# Altium PCB St_Olavs_Alarm.PcbDoc
Units mm, origin at the board's own origin, x right, y up, seen from the top; angles counter-clockwise.
Board outline 44.97 x 44.34 mm, 4 copper layers (Top Layer, Layer 1, Layer 2, Bottom Layer), stack 0.353 mm thick; 45 components, 28 nets, 150 pads, 54 vias.
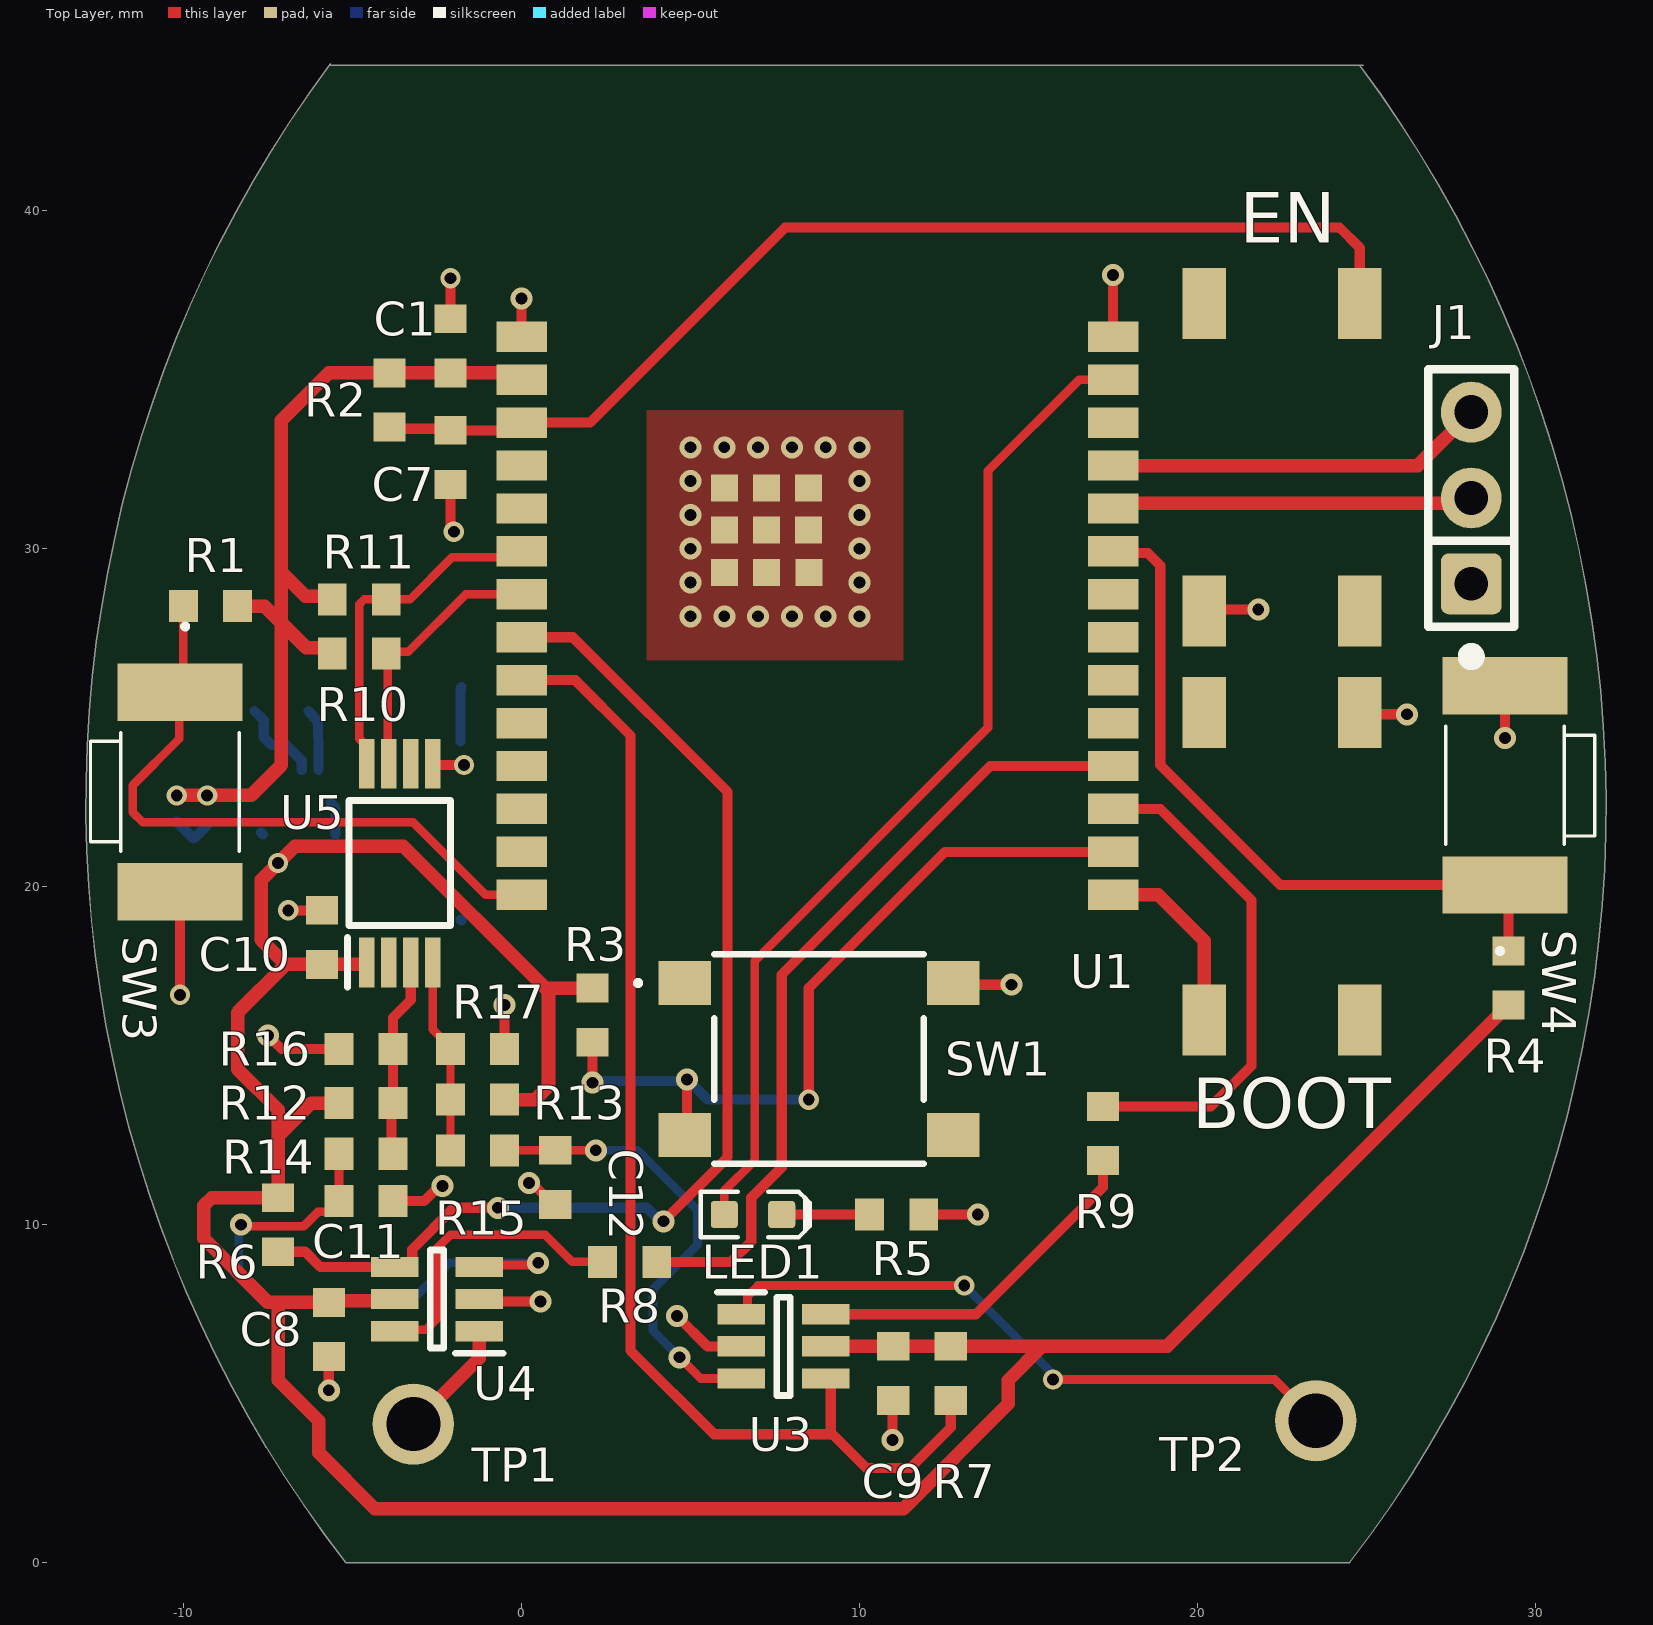
[diagram p0: Top Layer view]
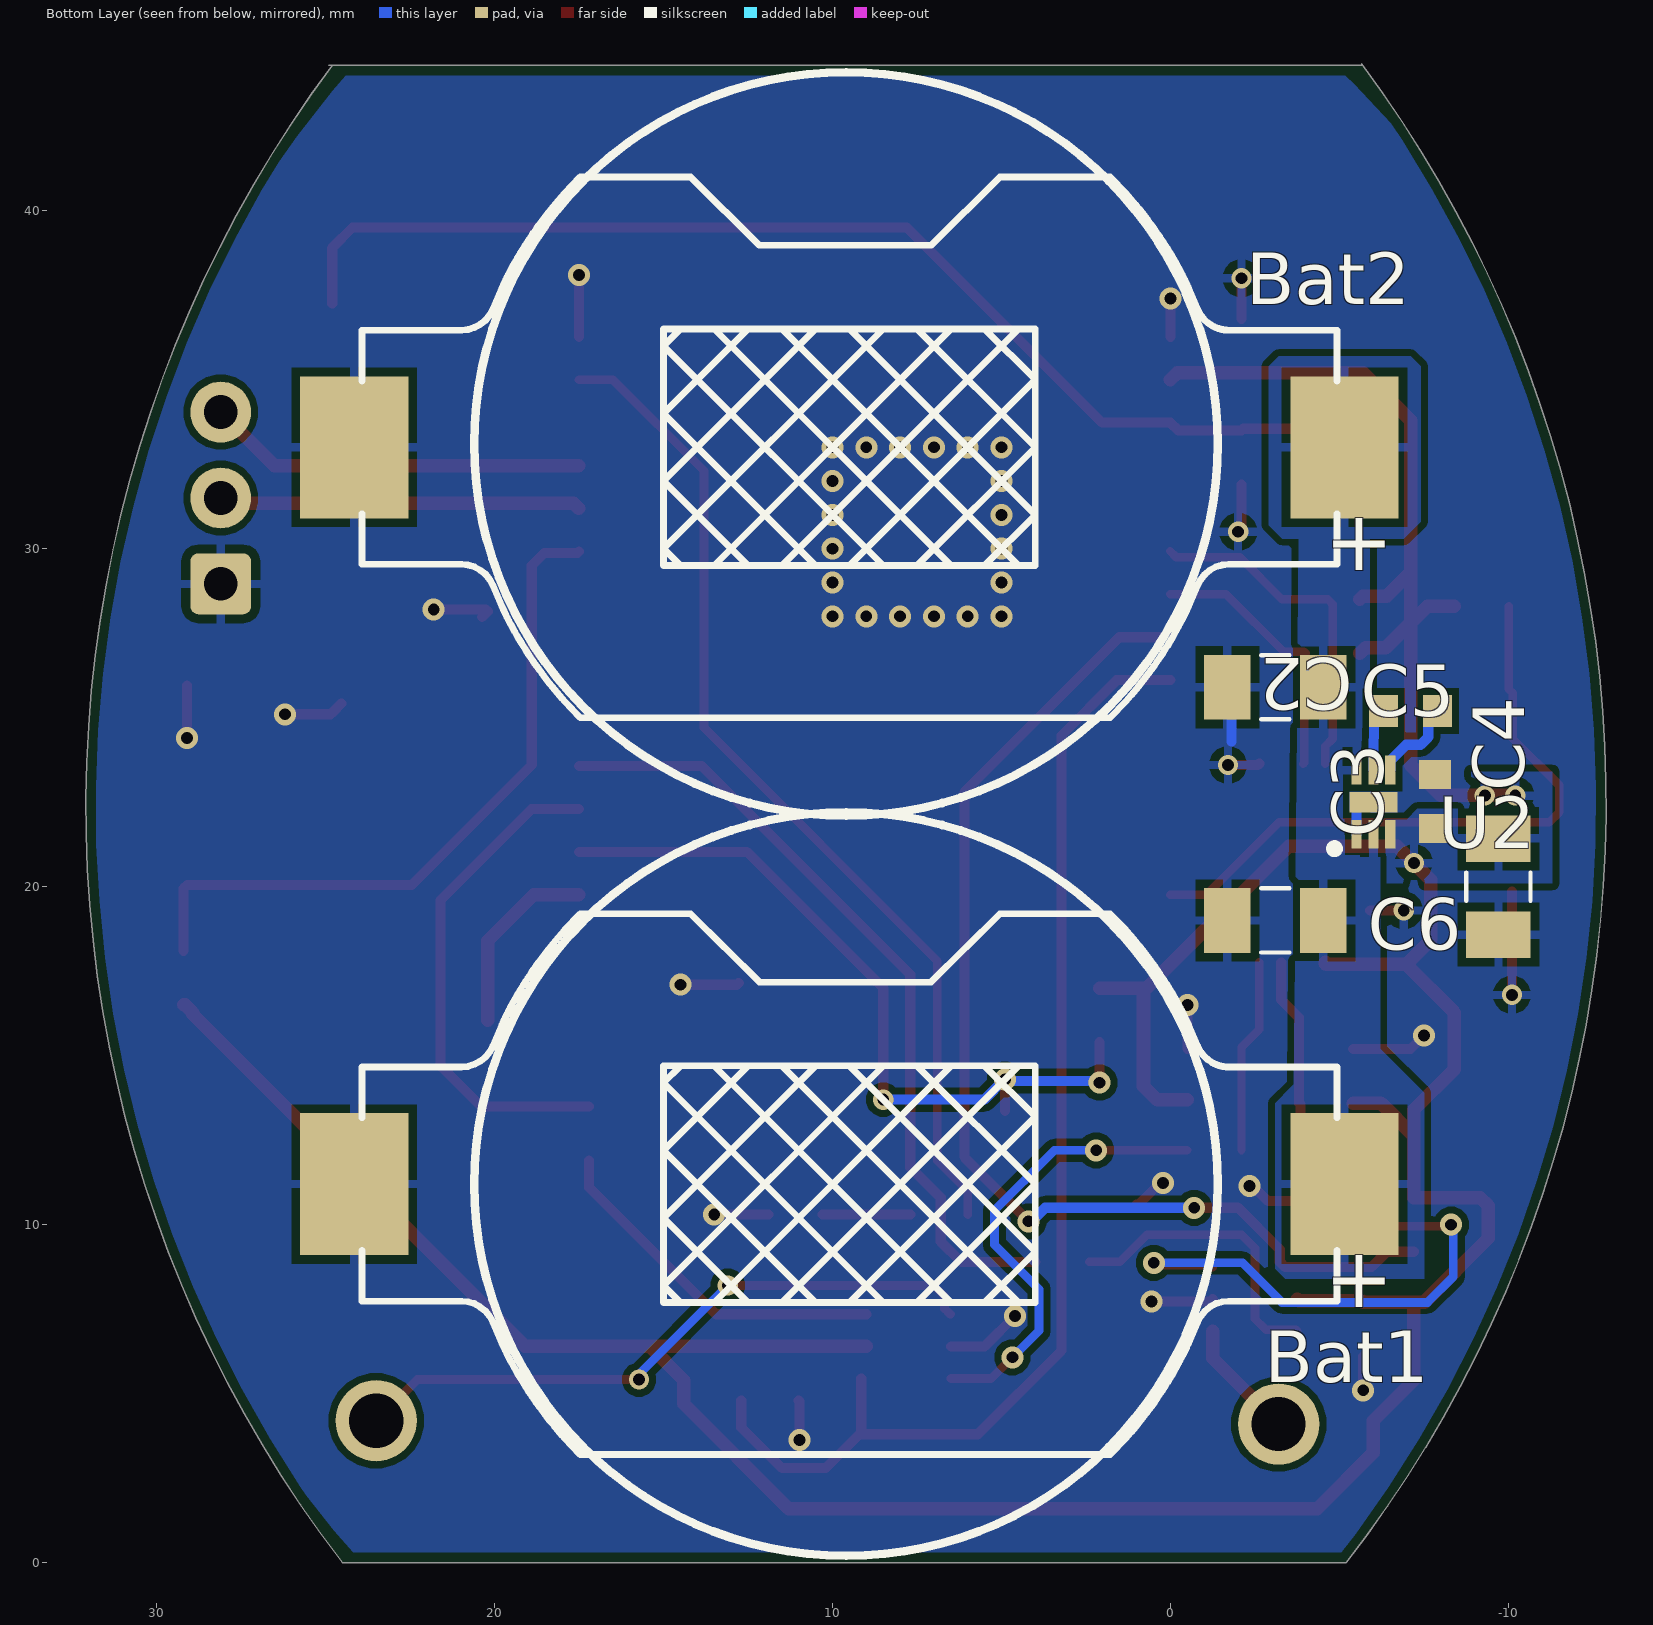
[diagram p1: Bottom Layer view, seen from below]
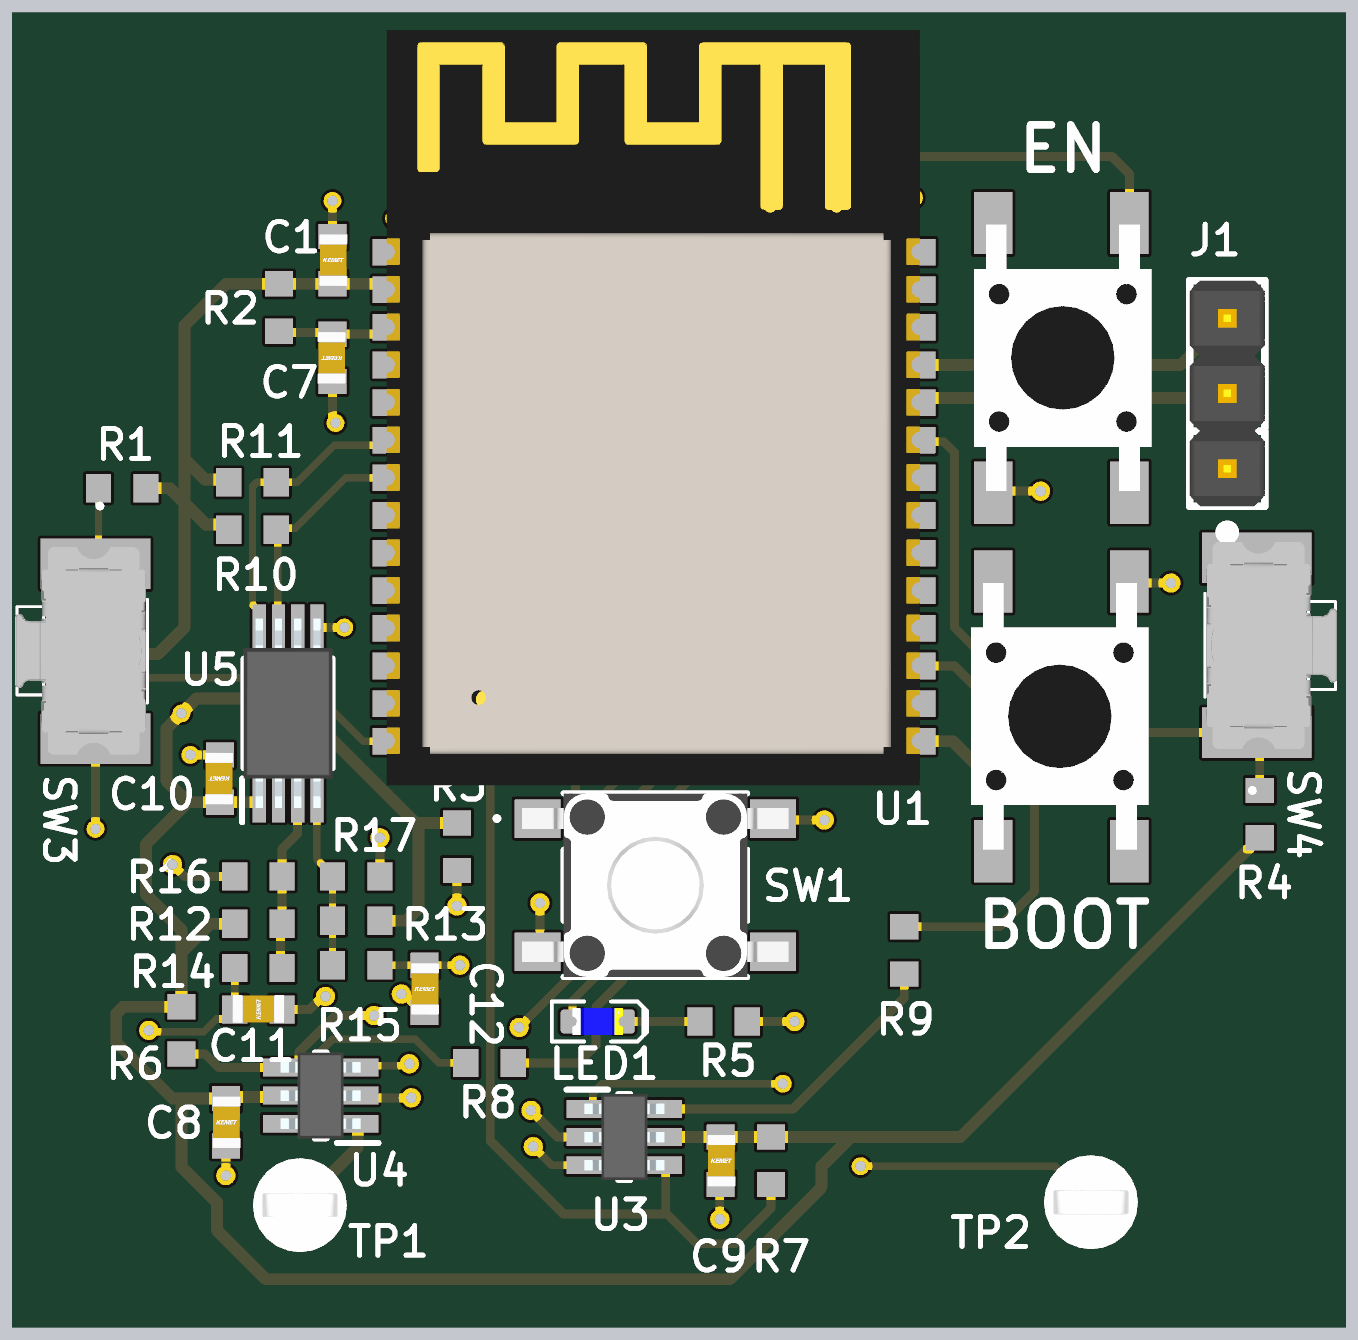
[diagram p2: 3D render of the assembled board from above, using the file's embedded part models]
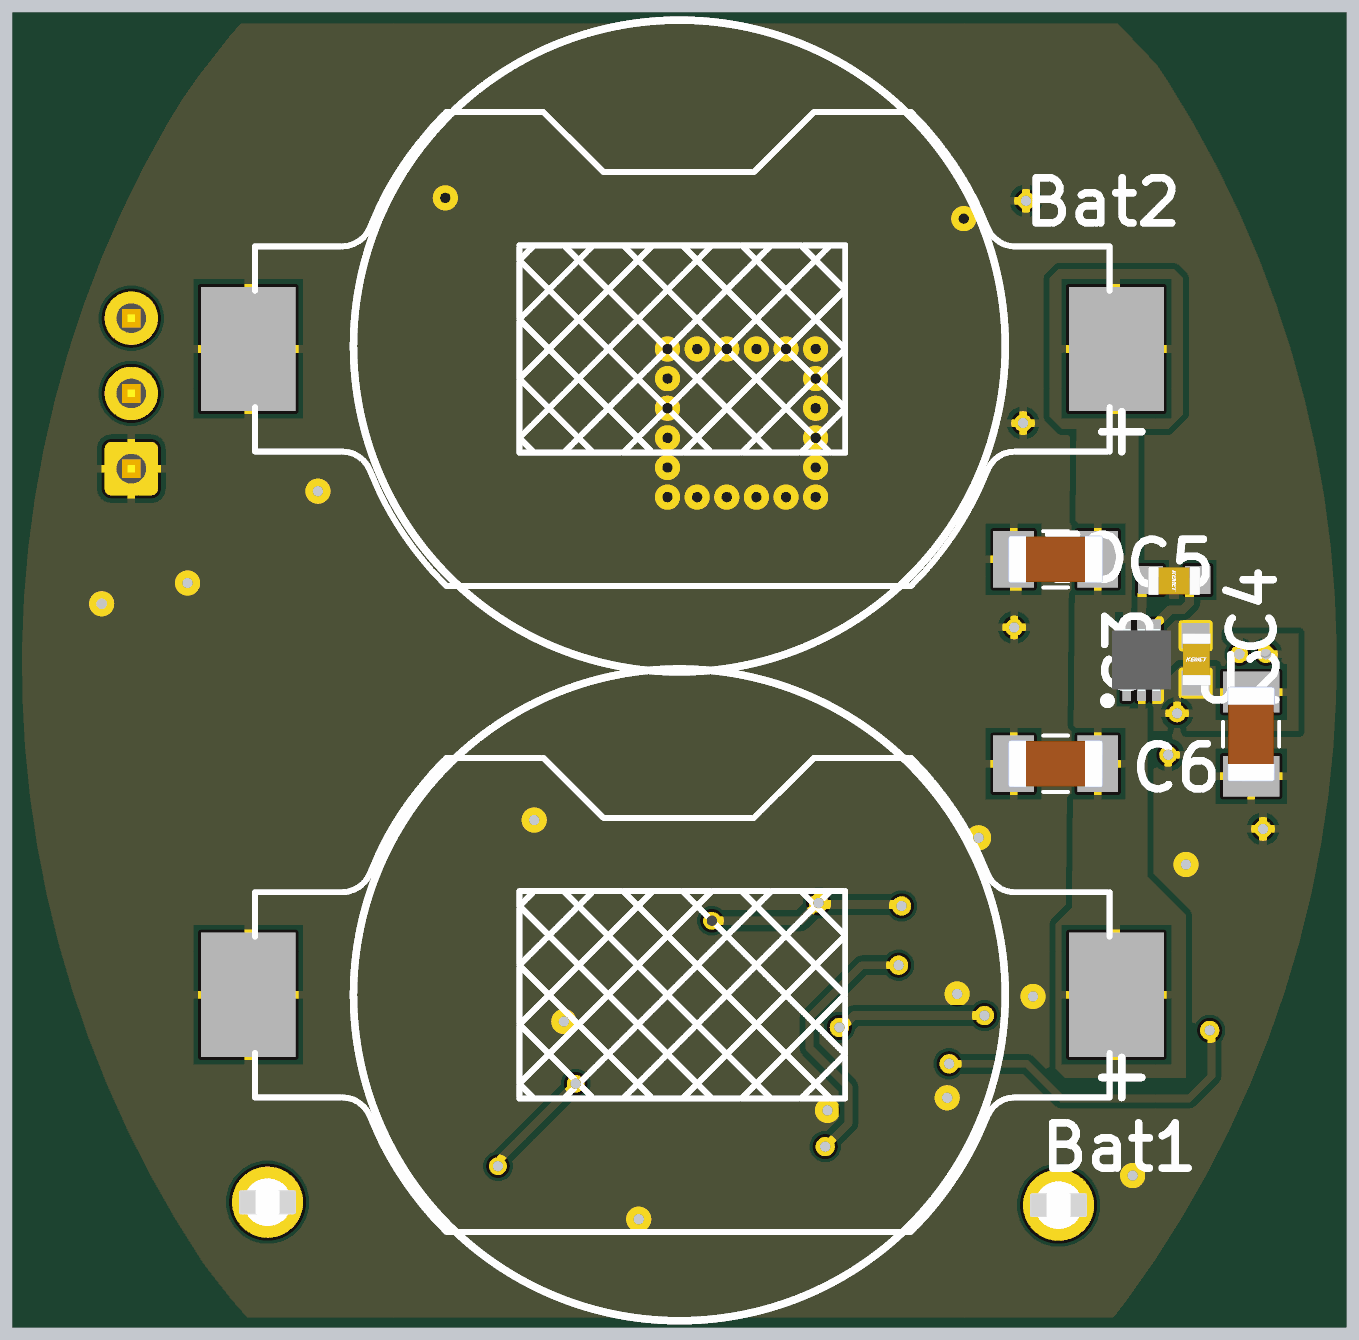
[diagram p3: 3D render of the assembled board from below, using the file's embedded part models]

## Layer stack, top to bottom
Top Solder: solder mask 0.0102, Solder Resist, Dk 3.5
Top Layer: signal copper 0.035
Dielectric 2: prepreg 0.0711, PP-006, Dk 4.1
Layer 1: signal copper 0.035
Dielectric 1: prepreg 0.0711, PP-006, Dk 4.1
Layer 2: signal copper 0.035
Dielectric 3: prepreg 0.0711, PP-006, Dk 4.1
Bottom Layer: signal copper 0.035
Bottom Solder: solder mask 0.0102, Solder Resist, Dk 3.5

## Board outline
-5.2,0 cw(c23.814,22.474) -5.661,44.34 -5.661,44.3 24.9,44.3 24.798,44.3 cw(c-4.612,22.347) 24.5,0

## Design rules (kind name [scope] priority, off if disabled: settings)
BoardOutlineClearance [Not (OnLayer('Top Overlay') Or OnLayer('Bottom Overlay'))] p1: gap=0.3 ignorepadtopadclearanceinfootprint=FALSE
Clearance Clearance_1 [All] p1: gap=0.2 ignorepadtopadclearanceinfootprint=FALSE except(0.127: SMDPad-SMDPad)
DiffPairsRouting DiffPairsRouting_1 [(InNet('CAN0L') OR InNet('CAN0H'))] p1: maxlimit=0.254 minlimit=0.254 mostfreqgap=0.254 toplayer_minwidth=0.381 toplayer_maxwidth=0.381 toplayer_prefwidth=0.381 midlayer1_minwidth=0.381 midlayer1_maxwidth=0.381 midlayer1_prefwidth=0.381 midlayer2_minwidth=0.381 midlayer2_maxwidth=0.381 midlayer2_prefwidth=0.381 bottomlayer_minwidth=0.381 bottomlayer_maxwidth=0.381 bottomlayer_prefwidth=0.381 maxuncoupledlength=12.7
DiffPairsRouting [All] p2: maxlimit=0.254 minlimit=0.15 mostfreqgap=0.2 toplayer_minwidth=0.15 toplayer_maxwidth=1 toplayer_prefwidth=0.2 midlayer1_minwidth=0.15 midlayer1_maxwidth=1 midlayer1_prefwidth=0.2 midlayer2_minwidth=0.15 midlayer2_maxwidth=1 midlayer2_prefwidth=0.2 bottomlayer_minwidth=0.15 bottomlayer_maxwidth=1 bottomlayer_prefwidth=0.2 maxuncoupledlength=12.7
Height [All] p1: minheight=0 maxheight=40 prefheight=12.7
HoleSize [All] p1: absolutevalues=TRUE maxlimit=5.5 minlimit=0.3 maxpercent=80.000 minpercent=20.000
HoleToHoleClearance [All] p1: gap=0.5 allowstackedmicrovias=TRUE
MinimumSolderMaskSliver [All] p1: minsoldermaskwidth=0.1
PolygonConnect [All] p1: connectstyle=Relief reliefconductorwidth=0.254 reliefentries=4 polygonreliefangle="90 Angle" airgapwidth=0.254
RoutingVias [All] p1: holewidth=0.35 width=0.6 viastyle="Through Hole" minholewidth=0.15 minwidth=0.25 maxholewidth=0.7 maxwidth=1.5
SilkToSilkClearance [All] p1: silktosilkclearance=0.07
SolderMaskExpansion [All] p1: expansion=0.1 istentingtop=FALSE
Width [All] p1: maxlimit=5 minlimit=0.15 preferedwidth=0.2 checkconnectedcopper=TRUE
24 further rules are at their usual default settings.

## Components (designator, comment, footprint, x,y, rotation, side; value= is the part's Value field where it differs from the comment)
Bat1 "Bat Holder L-KLS5-CR2032-23-B1" L-KLS5-CR2032-23-B1 9.5,11.2 r0 bottom locked value="Bat Holder CR2032"
Bat2 "Bat Holder L-KLS5-CR2032-23-B1" L-KLS5-CR2032-23-B1 9.5,33 r0 bottom locked value="Bat Holder CR2032"
BOOT "Tactile switch" "TE connectivity part no. 2-1437565-8" 22.5,20.6 r0 top
C1 "2.2 uF 50V" "0603 Capacitor" -2.1,36 r270 top
C2 "2.2 uF 50V" "0603 Capacitor" -7.1,25.2 r0 bottom
C3 "2.2 uF 50V" "0603 Capacitor" -7.827,22.521 r270 bottom
C4 "220uF 4V" "1206 CAPC3216X190N" -9.7,20 r270 bottom
C5 "220uF 4V" "1206 CAPC3216X190N" -3.1,25.9 r0 bottom
C6 "220uF 4V" "1206 CAPC3216X190N" -3.1,19 r0 bottom
C7 "2.2 uF 50V" "0603 Capacitor" -2.1,32.7 r90 top
C8 "100nF 50V" "0603 Capacitor" -5.7,6.9 r270 top
C9 "100nF 50V" "0603 Capacitor" 11,5.6 r270 top
C10 "100nF 50V" "0603 Capacitor" -5.9,18.5 r90 top
C11 "100nF 50V" "0603 Capacitor" -4.6,10.7 r0 top
C12 "100nF 50V" "0603 Capacitor" 1,11.4 r270 top
EN "Tactile switch" "TE connectivity part no. 2-1437565-8" 22.5,32.7 r180 top
J1 "3x1 pin header" "Pin Header 1x3 TH Pitch 2.54mm" 28.1,28.96 r90 top
LED1 "0603-LED Blue" "0603-Diode LED, Blue" 6.85,10.3 r0 top
R1 "100K-0603" "0603 RESISTOR" -9.2,28.3 r0 top
R2 "10K-0603" "0603 RESISTOR" -3.9,34.4 r90 top
R3 "100K-0603" "0603 RESISTOR" 2.1,16.2 r90 top
R4 "100K-0603" "0603 RESISTOR" 29.2,17.3 r270 top
R5 "1K-0603" "0603 RESISTOR" 11.1,10.3 r180 top
R6 "10K-0603" "0603 RESISTOR" -7.2,10 r90 top
R7 "10K-0603" "0603 RESISTOR" 12.7,5.6 r90 top
R8 "10K-0603" "0603 RESISTOR" 3.2,8.9 r0 top
R9 "10K-0603" "0603 RESISTOR" 17.2,12.7 r270 top
R10 "10K-0603" "0603 RESISTOR" -4.8,26.9 r180 top
R11 "10K-0603" "0603 RESISTOR" -4.8,28.5 r180 top
R12 "1K-0603" "0603 RESISTOR" -4.6,13.6 r180 top
R13 "1K-0603" "0603 RESISTOR" -1.3,13.7 r180 top
R14 "1K-0603" "0603 RESISTOR" -4.6,12.1 r180 top
R15 "1K-0603" "0603 RESISTOR" -1.3,12.2 r180 top
R16 "1K-0603" "0603 RESISTOR" -4.6,15.2 r0 top
R17 "1K-0603" "0603 RESISTOR" -1.3,15.2 r0 top
SW1 "Tactile switch" 430182080816 8.8,14.9 r0 top
SW3 "Tacktile switch" KSS241GLFS -10.1,22.8 r270 top
SW4 "Tacktile switch" KSS241GLFS 29.1,23 r90 top
TP1 "5007 - White" 5006-Footprint-1 -3.2,4.1 r180 top
TP2 "5007 - White" 5006-Footprint-1 23.5,4.2 r180 top
U1 "ESP32-C6-WROOM-1-N4" ESP32-C6-WROOM-1-N4-Footprint-1 0.005,19.76 r0 top
U2 "LTC3204-3.3" LTC3204 -6,22.5 r90 bottom
U3 "MTCH101" SOT95P270X145-6N 7.75,6.4 r0 top
U4 "MTCH101" SOT95P270X145-6N -2.5,7.8 r180 top
U5 "MCP47FEB12A2-E_ST" SOP65P640X120-8N -3.6,20.7 r90 top

## Footprints (in the part's own frame and the unit in brackets; to place one, negate y for a bottom-side part, rotate by r counter-clockwise, add the part's x,y. Pads: shape width x height; smd on the part's side, far side on the other; paste and mask are expansions set on the pad)
"0603 Capacitor" [mm]
  rect 0.85x0.95 smd: 1(-0.8,0) 2(0.8,0)
  body extent -0.87,-0.45 0.87,0.5, height 0.95
"0603 RESISTOR" [mm] "Resistor, 0603, RMCF, 1,55x0,80mm, IPC Medium Density"
  rect 0.85x0.95 smd: 1(-0.8,0) 2(0.8,0)
  body extent -0.85,-0.48 0.85,0.48, height 0.6
"0603-Diode LED, Blue" [mm]
  round 0.254 on Mech14: 0(0,0)
  rrect25% 0.8x0.8 smd: 1(-0.85,0) 2(0.85,0)
  silkscreen extent -1.55,-0.67 1.68,0.67, body extent -0.85,-0.45 0.85,0.45, height 0.9
"1206 CAPC3216X190N" [mm]
  rect 1.37x1.91 smd: 1(-1.421,0) 2(1.421,0)
  silkscreen extent -0.42,-0.95 0.42,0.95, body extent -1.6,-0.8 1.6,0.8, height 1.9
5006-Footprint-1 [mm]
  round 2.4 hole 1.6: 1(0,0)
  body extent -1.59,-1.59 1.59,1.59, height 5.59
430182080816 [mm]
  rect 1.55x1.3 smd: 1(-3.975,2.25) 2(-3.975,-2.25) 3(3.975,2.25) 4(3.975,-2.25)
  silkscreen extent -5.4,-3.1 3.1,3.1, body extent -4.5,-3.1 4.5,3.1, height 8
ESP32-C6-WROOM-1-N4-Footprint-1 [mm]
  rect 1.5x0.9 smd: 1(0,16.51) 2(0,15.24) 3(0,13.97) 4(0,12.7) 5(0,11.43) 6(0,10.16) 7(0,8.89) 8(0,7.62) 9(0,6.35) 10(0,5.08) 11(0,3.81) 12(0,2.54) 13(0,1.27) 14(0,0) 15(17.5,0) 16(17.5,1.27) 17(17.5,2.54) 18(17.5,3.81) 19(17.5,5.08) 20(17.5,6.35) 21(17.5,7.62) 22(17.5,8.89) 23(17.5,10.16) 24(17.5,11.43) 25(17.5,12.7) 26(17.5,13.97) 27(17.5,15.24) 28(17.5,16.51)
  rect 0.8x0.8 smd: 29(5.995,9.54) 29(5.995,10.79) 29(5.995,12.04) 29(7.245,9.54) 29(7.245,10.79) 29(7.245,12.04) 29(8.489,10.79) 29(8.489,12.04) 29(8.495,9.54)
  body extent -0.28,-1.49 17.72,24.01, height 3.16
KSS241GLFS [mm] "KSS241GLFS Tactile Switch"
  rect 1.7x3.7 smd: 1(-2.95,0) 2(2.95,0)
  silkscreen extent -4.95,-2.65 1.75,1.75, body extent -3.51,-2.71 3.49,1.7, height 1.66
L-KLS5-CR2032-23-B1 [mm]
  rect 3.2x4.2 smd: 1(-14.65,0) 2(14.65,0)
  silkscreen extent -14.42,-8 14.42,8, body extent -15.7,-8 15.85,8, height 5.17
LTC3204 [mm]
  rect 0.85x0.3 smd: 1(-0.95,0.5) 2(-0.95,0) 3(-0.95,-0.5) 4(0.95,-0.5) 5(0.95,0) 6(0.95,0.5)
  rect 0.61x1.42 smd: 7(0,0)
  silkscreen extent -1.5,1.03 -1.25,1.28, body extent -1.05,-1 1.05,1, height 0.8
"Pin Header 1x3 TH Pitch 2.54mm" [mm] "PinHeader 1x3 TH Pitch 2.54mm"
  rrect25% 1.8x1.8 hole 1: 1(0,0)
  round 1.8 hole 1: 2(2.54,0) 3(5.08,0)
  silkscreen extent -2.3,-1.27 6.35,1.27, body extent -1.27,-1.27 6.35,1.27, height 9.5
SOP65P640X120-8N [mm]
  rect 1.475x0.45 smd: 1(-2.938,0.975) 2(-2.938,0.325) 3(-2.938,-0.325) 4(-2.938,-0.975) 5(2.938,-0.975) 6(2.938,-0.325) 7(2.938,0.325) 8(2.938,0.975)
  silkscreen extent -3.67,-1.5 1.85,1.55, body extent -3.2,-1.5 3.2,1.5, height 1.2
SOT95P270X145-6N [mm]
  rect 1.4x0.6 smd: 1(-1.25,0.95) 2(-1.25,0) 3(-1.25,-0.95) 4(1.25,-0.95) 5(1.25,0) 6(1.25,0.95)
  silkscreen extent -1.95,-1.45 0.2,1.6, body extent -1.35,-1.45 1.35,1.45, height 1.45
"TE connectivity part no. 2-1437565-8" [mm] "Tactile switch (pushbutton)"
  rect 1.3x2.1 smd: 1(-2.3,4.55) 2(-2.3,-4.55) 3(2.3,4.55) 4(2.3,-4.55)
  body extent -3.05,-4.5 2.95,4.5, height 4.3

## Part data
Bat1 Bat2: library part CMP-023-000003.0.1, "Bat Holder CR2032 SMD", Manufacturer="KLS Electronic", Manufacturer Part Number=L-KLS5-CR2032-23-B1, Part number IPS=N.A., Artikkelnr Noca=N.A., Author=rsk, Component Class=Connectors, Component Type=Standard, ComponentLink1Description=Datasheet, ComponentLink1URL=http://www.klsele.com/admin/product_upload/20151124103736KLS5-CR2032-23-B.pdf, ComponentLink2Description="Supplier link", ComponentLink2URL=N.A., Design Item ID="Bat Holder L-KLS5-CR2032-23-B1", Footprint Doc=CR2032_HOLDER, HelpURL=http://www.klsele.com/products/connectors/Coin-Cell-Holders-Series/4685.html, LatestRevisionDate=2019-08-29, Note="Bat Holder CR2032", Pad Count=2, Part Number="Bat Holder L-KLS5-CR2032-23-B1", Part number Norautron=N.A., PartId=100500651, Pin Count=2, Published=2019-08-28, Source=pca10056.SCHLIB
BOOT EN: library part "Tactile switch SMD", "Tactile switch SMD Mount"
C1 C2 C3 C7: library part "CAP 2.2uF", "2.2uF 10V 0603"
C4 C5 C6: library part "CAP 220uF", "220uF 4V 1206"
C8 C9 C10 C11 C12: library part "CAP 100nF", "100nF 50V 0603"
J1: library part CMP-001-A02-7, "2.54mm pitch"
R1 R3 R4: library part CMP-009-00186-5_1, "Res 100K Ohm Thick Film 0603 1% 1/10W ±100ppm/°C Molded SMD SMD Paper T/R", Case Code (Imperial)=0603, Case Code (Metric)=1608, Max Power Dissipation=100mW, Ratings=AEC-Q200, Resistor Type="Thick Film", Temperature Coefficient=100ppm/°C, Construction=Rectangular, Contact Plating=Tin,Matte, Depth=0.8mm, Features="Automotive AEC-Q200", Height=0.022inch, Lead Free="Lead Free", Length=1.55mm, Military Standard=Not, Number of Terminations=2, Power Rating=100mW, Radiation Hardening=No, Series=RMCF, Width=0.031inch
R2 R6 R7 R8 R9 R10 R11: library part CMP-009-00186-5, "Res 10K Ohm Thick Film 0603 1% 1/10W ±100ppm/°C Molded SMD SMD Paper T/R", Case Code (Imperial)=0603, Case Code (Metric)=1608, Max Power Dissipation=100mW, Ratings=AEC-Q200, Resistor Type="Thick Film", Temperature Coefficient=100ppm/°C, Construction=Rectangular, Contact Plating=Tin,Matte, Depth=0.8mm, Features="Automotive AEC-Q200", Height=0.022inch, Lead Free="Lead Free", Length=1.55mm, Military Standard=Not, Number of Terminations=2, Power Rating=100mW, Radiation Hardening=No, Series=RMCF, Width=0.031inch
R5 R12 R13 R14 R15 R16 R17: library part CMP-009-00186-5_1_1, "Res 1K Ohm Thick Film 0603 1% 1/10W ±100ppm/°C Molded SMD SMD Paper T/R", Case Code (Imperial)=0603, Case Code (Metric)=1608, Max Power Dissipation=100mW, Ratings=AEC-Q200, Resistor Type="Thick Film", Temperature Coefficient=100ppm/°C, Construction=Rectangular, Contact Plating=Tin,Matte, Depth=0.8mm, Features="Automotive AEC-Q200", Height=0.022inch, Lead Free="Lead Free", Length=1.55mm, Military Standard=Not, Number of Terminations=2, Power Rating=100mW, Radiation Hardening=No, Series=RMCF, Width=0.031inch
SW1: library part "Tactile switch Big", "Tactile switch SMD Longer Neck"
SW3 SW4: library part KSS241GLFS, "KSS241GLFS"
TP1 TP2: library part CMP-00049-A.2, "KEYSTONE - 5007 - TEST POINT, THT, WHITE", Color=Black, Flammability Rating="UL94 V-0", Housing Color=White, Package Quantity=100, Body Material=PBT, Contact Material=Bronze, Contact Plating=Tin,Silver, Height=0.35inch, Hole Diameter=1.6mm, Inside Diameter=1.78mm, Lead Free="Lead Free", Length=8.89mm, Material=Nylon,Bronze,Silver, Mount="PCB,Through Hole", Number of Ports=1, Orientation=Straight, Outside Diameter=3.18mm, Packaging=Bulk, Plating=Silver, REACH SVHC="No SVHC"
U1: library part CMP-020-00028-2, "Multiprotocol Modules ESP32-C6 module, Wi-Fi 6 in 2.4 GHz band, Bluetooth 5, Zigbee 3.0 and Thread. ESP32-WROOM Compatible"
U3 U4: library part MTCH101-I_OT, "Capasitive touch sensor", Arrow Part Number=MTCH101-I/OT, Manufacturer_Name=Microchip, Mouser Part Number=579-MTCH101-I/OT, Arrow Price/Stock=https://www.arrow.com/en/products/mtch101-iot/microchip-technology?region=nac, Datasheet Link=https://componentsearchengine.com/Datasheets/2/MTCH101-I_OT.pdf, Height=1.45mm, Manufacturer_Part_Number=MTCH101-I/OT, Mouser Price/Stock=https://www.mouser.co.uk/ProductDetail/Microchip-Technology/MTCH101-I-OT?qs=VteoEApvSIB767sF5JiK8g%3D%3D
U5: "Integrated Circuit", Arrow Part Number=MCP47FEB12A2-E/ST, Manufacturer_Name=Microchip, Mouser Part Number=579-MCP47FEB12A2EST, Arrow Price/Stock=https://www.arrow.com/en/products/mcp47feb12a2-est/microchip-technology, Datasheet Link=https://mouser.componentsearchengine.com/Datasheets/1/MCP47FEB12A2-E_ST.pdf, Height=1.2mm, Manufacturer_Part_Number=MCP47FEB12A2-E/ST, Mouser Price/Stock=https://www.mouser.co.uk/ProductDetail/Microchip-Technology/MCP47FEB12A2-E-ST?qs=rQCxX1QmdjLtqLT1GQsN%252BQ%3D%3D

## Via types
v1: diameter 0.65, hole 0.35, Top Layer to Bottom Layer, 43 vias
v2: diameter 0.6, hole 0.35, Top Layer to Bottom Layer, 11 vias

## Nets (pads, with @x,y where several pads share a name; then routed paths per layer and width w, separated by ;. In a path a pad name is that pad's centre, name@x,y a point inside that pad or via, vN(x,y) a via of type N, cw(c..) or ccw(c..) an arc to the next point about the centre after c; other vN are vias at no path point)
0V: Bat1.2 Bat2.2 BOOT.3 C1.1 C3.1 C4.2 C5.2 C6.2 C7.1 C8.2 C9.2 C10.2 C11.2 C12.2 EN.3 J1.1 R5.1 R16.1 R17.2 SW1.3 SW3.2 SW4.2 U1.1 U1.28 U1.29 U2.1 U2.7 U3.2 U4.2 U5.5 | length 34.4
  Top Layer w0.3: v2(-10.1,16.8) SW3.2 ; v1(-7.5,15.6) -7.1,15.2 R16.1 ; v2(-6.9,19.3) C10.2 ; v1(-5.7,5.1) C8.2 ; C11.2 -2.879,10.7 -2.433,11.146 v1(-2.338,11.146) ; U5.5 -2.587,23.6 v2(-1.7,23.6) ; C7.1 -2.1,30.681 -2,30.581 v2(-2,30.5) ; C1.1 v2(-2.1,38) ; U4.2 -1.174,7.724 v1(0.56,7.724) ; R17.2 v1(-0.5,16.5) ; v1(0,37.4) 0,36.275 U1.1 ; v1(0.224,11.229) 0.291,11.162 0.388,11.162 0.95,10.6 C12.2 ; v1(4.6,7.3) 5.5,6.4 U3.2 ; v1(10.973,3.627) 10.973,4.773 C9.2 ; R5.1 v1(13.5,10.3) ; SW1.3 12.825,17.1 v1(14.5,17.1) ; v1(17.5,38.1) 17.5,36.275 U1.28 ; EN.3@20.374,27.976 EN.3 20.25,28.2 v1(21.8,28.2) ; BOOT.3@24.526,25.424 BOOT.3 24.85,25.1 v1(26.2,25.1) ; v1(29.1,24.4) SW4.2
  Bottom Layer w0.3: U2.7@-5.655,22.5 -5.5,22.345 U2.1 ; C6.2@-1.8,19.021 C6.2@-1.779,19 ; -1.8,24.3 -1.8,25.879 C5.2@-1.779,25.9
  other v1: 5,28 6,28 7,28 8,28 9,28 10,28 5,29 10,29 5,30 10,30 5,31 10,31 5,32 10,32 5,33 6,33 7,33 8,33 9,33 10,33
3V3: C1.2 C3.2 C4.1 C8.1 C9.1 C10.1 R1.2 R2.2 R3.2 R4.2 R6.2 R7.2 R10.2 R11.2 R12.2 R13.1 U1.2 U2.3 U3.5 U4.5 U5.1 | length 123.2
  Top Layer w0.4: v2(-10.2,22.7) v2(-9.3,22.7) -8,22.7 -7.1,23.6 -7.1,27.8 ; R1.2 -7.6,28.3 -7.1,27.8 ; -6.575,7.7 -7.2,7.7 ; -6.535,7.7 C8.1 ; C10.1 -6.975,17.7 ; C10.1@-5.85,17.7 -4.6,17.7 -4.575,17.725 U5.1 ; C8.1@-5.65,7.75 -3.8,7.75 U4.5 ; R10.2 -5.774,27.074 -6.374,27.074 -7.1,27.8 ; R11.2 -5.691,28.591 -6.391,28.591 -7.1,29.3 ; R12.2 -6.225,13.6 -7.2,12.625 ; R13.1 0.4,13.7 0.8,14.1 0.8,17 ; U1.2 -0.195,35.2 C1.2 R2.2 -5.7,35.2 -7.1,33.8 -7.1,29.3 ; R3.2 0.8,17 ; U3.5 C9.1 R7.2 14.4,6.4 15.4,6.4 ; R4.2 29.15,16.5 28.925,16.275 28.925,16.225 19.1,6.4 15.4,6.4 ; -7.2,7.7 -7.5,7.7 -9.4,9.6 -9.4,10.566 -9.166,10.8 R6.2 -7.2,12.625 ; -7.2,7.7 -7.2,5.4 -6,4.2 -6,3.259 -4.341,1.6 11.3,1.6 14.4,4.7 14.4,5.4 15.4,6.4 ; -7.2,12.625 -7.2,13.4 -8.4,14.6 -8.4,16.275 -6.975,17.7 ; -7.1,27.8 -7.1,29.3 ; -6.975,17.7 -7.7,18.425 -7.7,20.2 v2(-7.2,20.7) -6.7,21.2 -3.5,21.2 0.7,17 0.8,17
  Bottom Layer w0.3: C4.1@-10.2,21.921 C4.1 C4.1@-9.3,21.821 ; C3.2@-7.7,21.6 C3.2@-7.65,21.55
BOOT: BOOT.2 U1.15 | length 5.6
  Top Layer w0.4: U1.15 18.84,19.76 20.2,18.4 BOOT.2
EN: C7.2 EN.2 R2.1 U1.3 | length 33.1
  Top Layer w0.3: R2.1 -3.85,33.55 -2.15,33.55 C7.2 -0.225,33.5 U1.3 2.03,33.73 7.8,39.5 24.2,39.5 24.8,38.9 EN.2
L_SB: R1.1 SW3.1 U1.14 | length 19.2
  Top Layer w0.25: R1.1 -10,25.85 -10.129,25.721 -10.129,24.371 -11.5,23 -11.5,22.2 -11.2,21.9 -3.2,21.9 -1.06,19.76 U1.14
LP_SCK: R10.1 U1.7 U5.7 | length 8
  Top Layer w0.25: U5.7 -3.95,23.663 -3.95,26.85 R10.1 -3.946,26.954 -3.346,26.954 -1.65,28.65 U1.7
LP_SDA: R11.1 U1.6 U5.8 | length 10.3
  Top Layer w0.25: U5.8 -4.575,24.151 -4.8,24.376 -4.8,28.354 -4.654,28.5 -3.3,28.5 -2.054,29.746 -0.169,29.746 U1.6
Main_conf: C12.1 R15.1 U3.3 | length 13.7
  Top Layer w0.25: R15.1 C12.1
  Top Layer w0.26: C12.1 v1(2.2,12.2) ; v1(4.677,6.077) 5.305,5.45 U3.3
  Bottom Layer w0.26: v1(2.2,12.2) 3.432,12.2 4.32,11.311 5.209,10.423 5.209,9.409 3.891,8.091 3.891,6.864 v1(4.677,6.077)
Main_conf_DAC: R13.2 R15.2 R17.1 U5.4 | length 5.8
  Top Layer w0.25: U5.4 -2.625,15.775 -2.1,15.25 R17.1 R13.2 R15.2
Main_ctrl: R9.1 U1.17 | length 15
  Top Layer w0.3: R9.1 20.4,13.5 21.6,14.7 21.6,19.6 18.9,22.3 U1.17
NetBat1_1: Bat1.1 Bat2.1 C5.1 C6.1 U2.2 U2.6
NetC2_1: C2.1 U2.4 | length 2.6
  Bottom Layer w0.3: C2.1 -7.625,24.925 -7.625,24.425 -7.4,24.2 -6.975,24.2 -6.5,23.725 U2.4
NetC2_2: C2.2 U2.5 | length 1.9
  Bottom Layer w0.3: C2.2 -6.025,24.875 -6,23.884 cw(c-6.35,23.875) -6,23.875 U2.5
NetLED1_1: LED1.1 U1.27 | length 30.1
  Top Layer w0.26: LED1.1 6,11 6.9,11.9 6.9,17.8 13.8,24.7 13.8,32.3 16.5,35 U1.27
NetLED1_2: LED1.2 R5.2 | length 2.6
  Top Layer w0.3: LED1.2 R5.2
NetR8_1: R8.1 U4.6 | length 8.9
  Top Layer w0.254: U4.6 -3.705,6.895 -2.818,6.895 -2.5,7.213 -2.5,9.3 -2.1,9.7 0.7,9.7 1.5,8.9 R8.1
NetR9_2: R9.2 U3.6 | length 10.6
  Top Layer w0.3: U3.6 13.45,7.35 17.2,11.1 R9.2
R_SB: R4.1 SW4.1 U1.23 | length 21.1
  Top Layer w0.3: U1.23 17.554,29.871 18.529,29.871 18.9,29.5 18.9,23.6 22.45,20.05 SW4.1 29.2,19.95 R4.1
Side_conf: C11.1 R14.2 U4.3 | length 17.7
  Top Layer w0.26: v1(-8.3,10) -8.255,9.955 -6.445,9.955 -6.016,10.384 -5.695,10.384 -5.4,10.679 C11.1 R14.2 ; U4.3 -1.189,8.811 0.435,8.811 v1(0.496,8.872)
  Bottom Layer w0.26: v1(-8.3,10) -8.362,9.938 -8.362,8.462 -7.6,7.7 -3.3,7.7 -2.128,8.872 v1(0.496,8.872)
Side_conf_DAC: R12.1 R14.1 R16.2 U5.3 | length 6
  Top Layer w0.3: R14.1@-3.85,12.05 -3.85,13.55 R12.1 R16.2 -3.8,16.125 -3.275,16.65 U5.3 ; R14.1@-3.825,12.075 R14.1@-3.775,12.125
Side_ctrl: R8.2 U1.18 | length 23.7
  Top Layer w0.3: R8.2 6.2,8.9 6.8,9.5 6.8,10.8 7.7,11.7 7.7,17.4 13.87,23.57 U1.18
TB: R3.1 SW1.2 U1.16 | length 22.8
  Top Layer w0.3: v1(2.1,14.2) R3.1 ; 4.9,13.372 v1(4.9,14.3) ; v2(8.5,13.7) 8.5,17 12.53,21.03 U1.16
  Bottom Layer w0.3: v1(2.1,14.2) 2.15,14.25 4.85,14.25 v1(4.9,14.3) 4.911,14.3 5.511,13.7 v2(8.5,13.7)
Touch_MCU_cent: R7.1 U1.9 U3.4 | length 36
  Top Layer w0.3: U1.9 1.59,26.11 3.225,24.475 3.225,6.275 5.7,3.8 9.2,3.8 ; U3.4@9.15,5.45 9.15,3.85 9.2,3.8 ; R7.1 12.7,4 11.5,2.8 10.2,2.8 9.2,3.8
Touch_MCU_Side: R6.1 U1.8 U4.4 | length 34.2
  Top Layer w0.3: R6.1 -6.4,9.2 -5.95,8.75 U4.4 -3.382,8.75 -3.232,8.9 -3.232,9.268 -2,10.5 v1(-0.7,10.5) ; U1.8 1.52,27.38 6.1,22.8 6.1,12 v1(4.2,10.1)
  Bottom Layer w0.3: v1(-0.7,10.5) 3.705,10.5 4.105,10.1 v1(4.2,10.1)
Touch_pad_cent: TP2.1 U3.1 | length 19.3
  Top Layer w0.26: U3.1 6.518,7.35 6.688,7.52 6.688,7.888 7,8.2 v2(13.1,8.2) ; v2(15.724,5.417) 22.283,5.417 TP2.1
  Bottom Layer w0.26: v2(13.1,8.2) 15.659,5.641 15.659,5.482 v2(15.724,5.417)
Touch_Pad_Side: TP1.1 U4.1 | length 3.6
  Top Layer w0.4: TP1.1 -1.25,6.05 U4.1
UART_RX_prog: J1.2 U1.24 | length 10.7
  Top Layer w0.4: U1.24 17.66,31.345 27.945,31.345 J1.2
UART_TX_prog: J1.3 U1.25 | length 11.2
  Top Layer w0.4: U1.25 26.52,32.46 J1.3
pads on no net: BOOT.1 BOOT.4 EN.1 EN.4 LED1.0 SW1.1 SW1.4 U1.4 U1.5 U1.10 U1.11 U1.12 U1.13 U1.19 U1.20 U1.21 U1.22 U1.26 U5.2 U5.6

## Polygon pours and split planes (outlines as drawn)
0V on Bottom Layer "0V_L04_P003" (solid, pour order 3): 4.5,0.296 -5.2,0.1 cw(c16.326,22.027) -4.8,44.34 3.641,44.159 cw(c9.046,25.586) 3.775,44.198 24.225,44.198 cw(c-1.075,22.275) 24.176,0.296
3V3 on Bottom Layer "3V3_L04_P002" (solid, pour order 2): -8.9,22.3 -8.9,23.4 -11.3,23.4 -11.3,20.1 -6.362,20.1 -6.362,22.005 -6.379,21.988 -6.988,21.988 -7.3,22.3
NetBat1_1 on Bottom Layer "NETBAT1_1_L04_P001" (solid, pour order 1): -5.9,30.3 -6.9,30.3 -7.4,30.8 -7.4,35.4 -7.1,35.7 -3.2,35.7 -2.9,35.4 -2.9,30.7 -3.3,30.3 -3.8,30.3 -3.65,14.15 -3.1,13.6 -3.1,8.7 -3.4,8.4 -7.5,8.4 -7.5,13.9 -6.2,15.2 -6.2,22.1 -5.9,22.1
0V on Top Layer "0V_L01_P004" (solid, pour order 4): 3.7,34.1 11.3,34.1 11.3,26.7 3.7,26.7

## Silkscreen, mask and mechanical layers (free items; w line width, h text height)
Bottom Overlay:
  circle w0.254: c9.6,33.1 r11
  circle w0.254: c9.6,11.2 r11
Mechanical 1:
  lines w0.254: -5.661,44.3 24.9,44.3 ; -5.661,44.34 ccw(c23.814,22.474) -5.2,0 24.5,0 ccw(c-4.612,22.347) 24.798,44.3

## Text inside footprints (layer, text, board x,y; h text height)
Bat1: Bottom Overlay "+" at -6.6,9.1 h1.78 r180
Bat2: Bottom Overlay "+" at -6.6,30.9 h1.78 r180